# Altium PCB lab1_kuchenov_usb_spi.PcbDoc
Units mm, origin at the board's own origin, x right, y up, seen from the top; angles counter-clockwise.
Board outline 46.3 x 26.3 mm, 4 copper layers (Top Layer, Signal Layer 1, Signal Layer 2, Bottom Layer), stack 1.522 mm thick; 25 components, 25 nets, 88 pads, 166 vias.
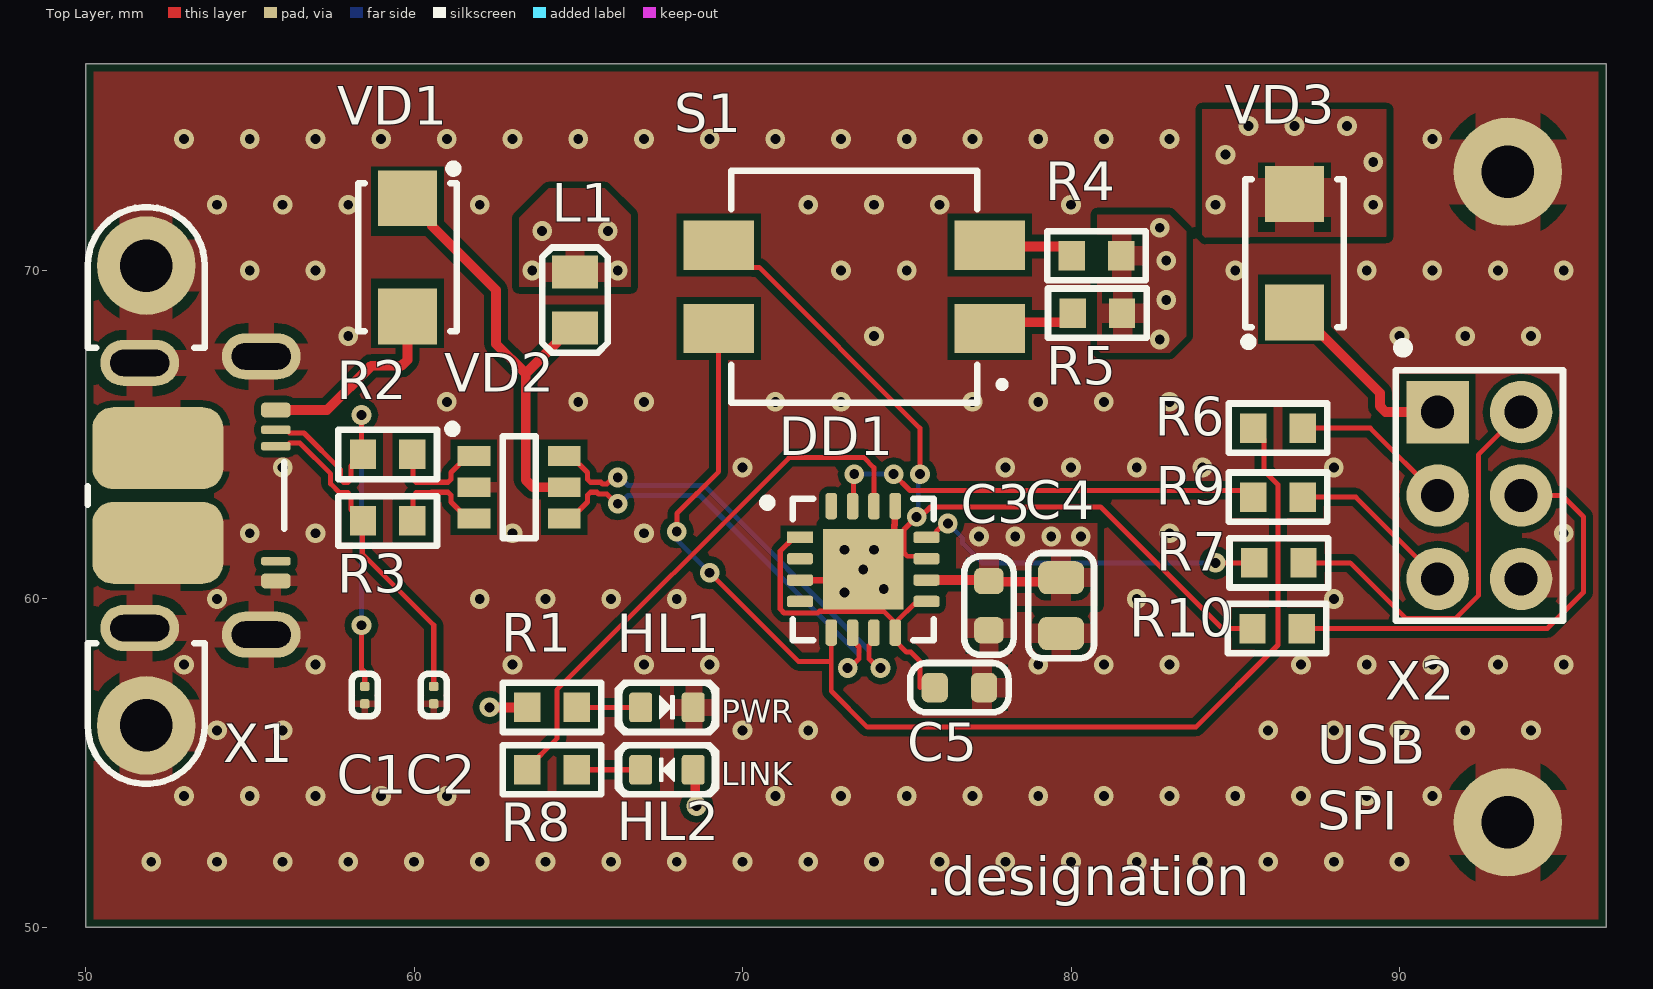
[diagram p0: Top Layer view]
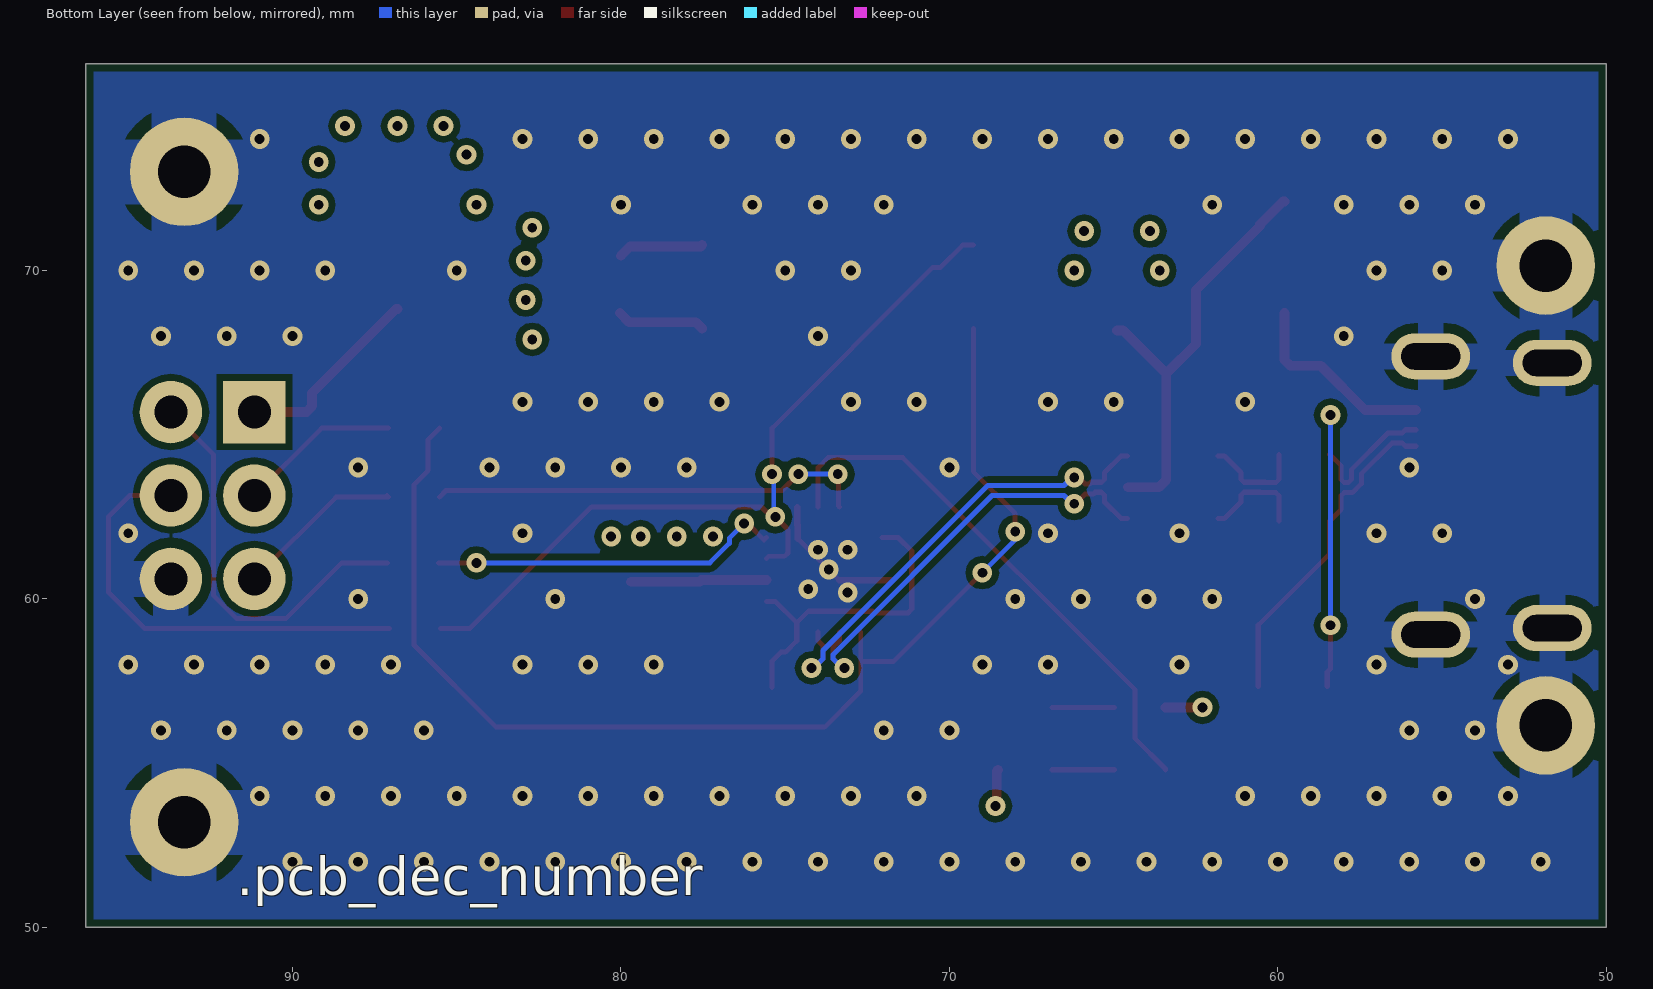
[diagram p1: Bottom Layer view, seen from below]
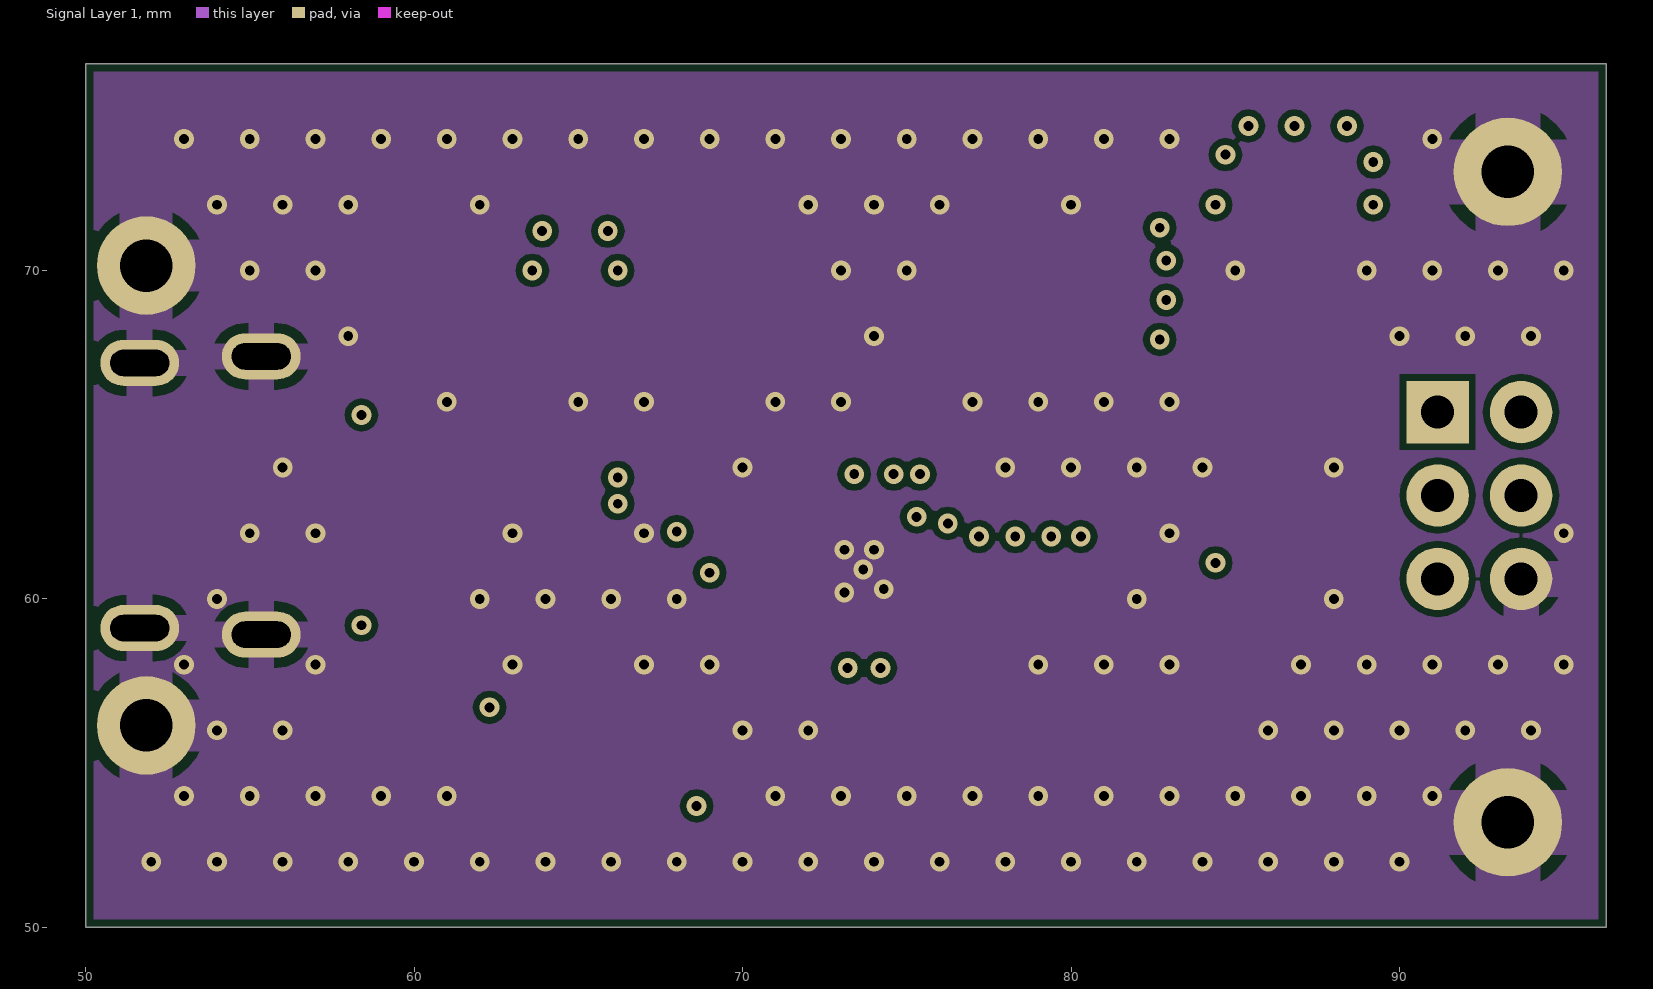
[diagram p2: Signal Layer 1]
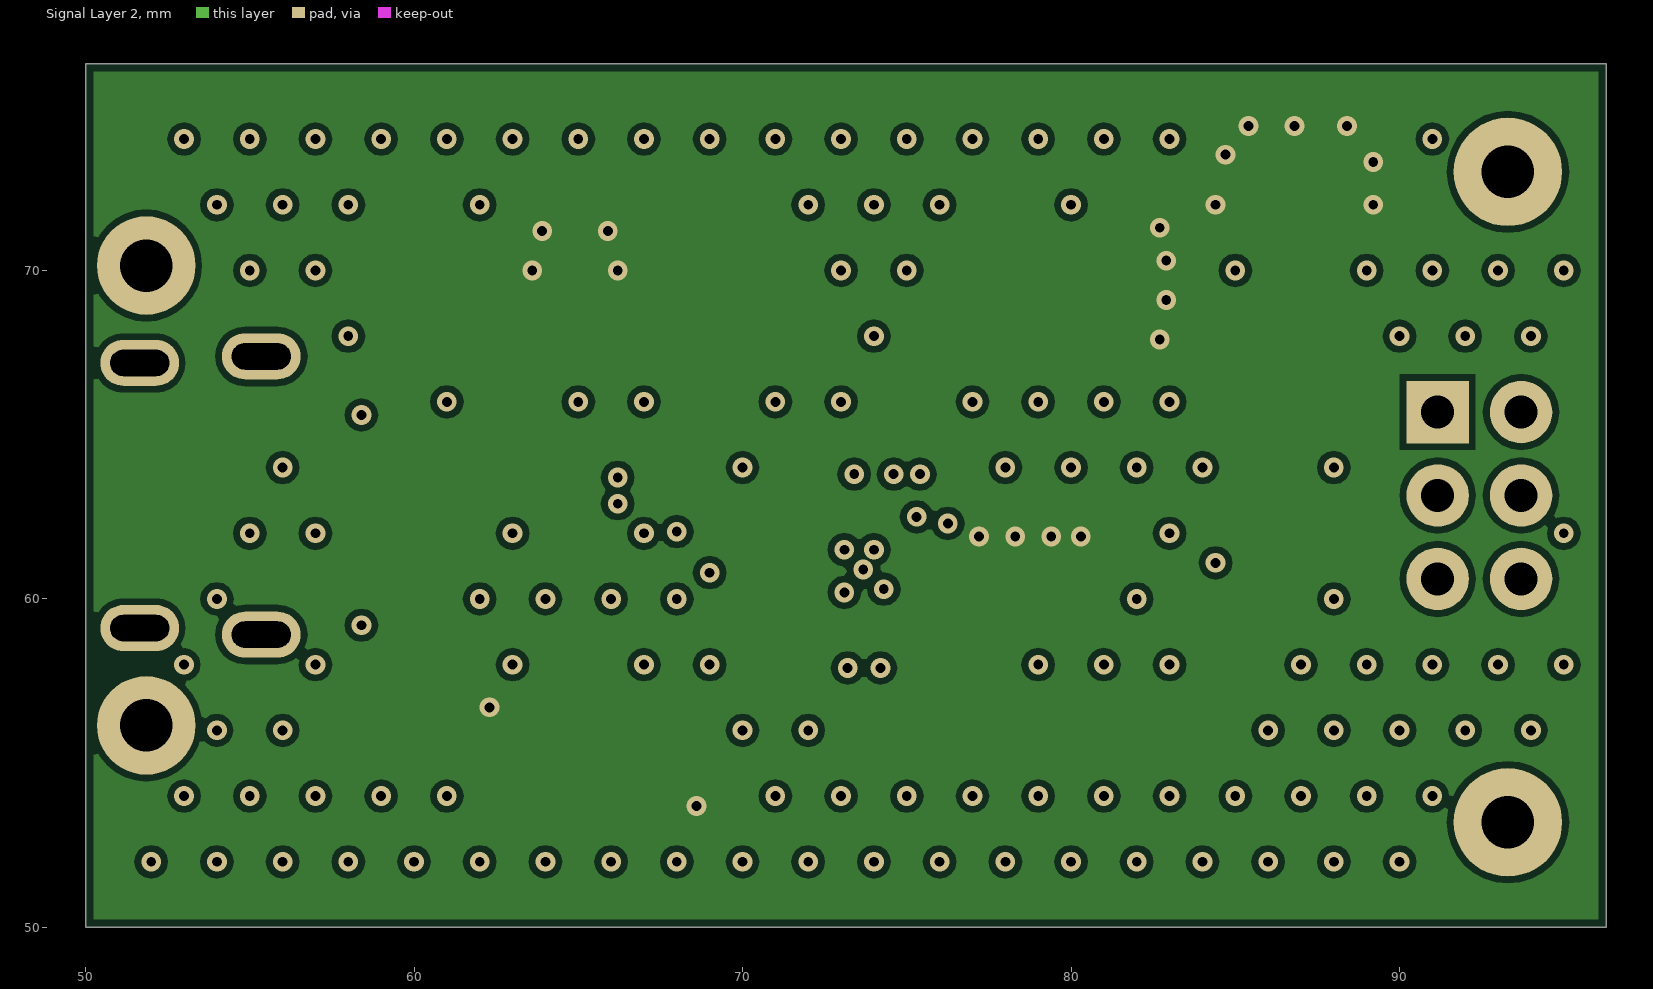
[diagram p3: Signal Layer 2]

## Layer stack, top to bottom
Top Solder: solder mask 0.0102, Solder Resist, Dk 3.5
Top Layer: signal copper 0.018
Prepreg 1: prepreg 0.125, FR4 HiTg170, Dk 5.07
Signal Layer 1: signal copper 0.018
Core 1: core 1.2, FR4, Dk 4.6
Signal Layer 2: signal copper 0.018
Prepreg 2: prepreg 0.125, FR4 HiTg170, Dk 5.07
Bottom Layer: signal copper 0.018
Bottom Solder: solder mask 0.0102, Solder Resist, Dk 3.5

## Board outline
50,50 96.3,50 96.3,76.3 50,76.3

## Design rules (kind name [scope] priority, off if disabled: settings)
AcuteAngle min_acute_angle [OnCopper] p1: minimum=3.50000000000000E+0001 checktracksonly=FALSE // Минимальный угол между примитивами топологии
BoardOutlineClearance board_outline_clearance_std [NOT (OnLayer('Bottom Overlay') OR OnLayer('Top Overlay'))] p1: gap=0.25 ignorepadtopadclearanceinfootprint=FALSE except(0: Arc-SplitContinuation Track-SplitContinuation SMDPad-SplitContinuation THPad-SplitContinuation Via-SplitContinuation Fill-SplitContinuation Poly-SplitContinuation Region-SplitContinuation Text-SplitContinuation) // Отступ элементов топологии от края фрезеруемой печатной платы
Clearance clearance_outer_18um_std [OnTopLayer OR OnBottomLayer] p1: gap=0.125 ignorepadtopadclearanceinfootprint=TRUE except(0.2: Arc-Fill Arc-Poly Track-Fill Track-Poly SMDPad-SMDPad SMDPad-Fill SMDPad-Poly THPad-Fill THPad-Poly Via-Fill Via-Poly Fill-Fill Fill-Poly Poly-Poly Poly-Region Poly-Text; 0.25: Arc-Hole Track-Hole SMDPad-Hole THPad-Hole Via-Hole Fill-Hole Poly-Hole Region-Hole Text-Hole) // Зазоры на внешних слоях
Clearance clearance_inner_18um_std [NOT (OnTopLayer Or OnBottomLayer)] p2: gap=0.125 ignorepadtopadclearanceinfootprint=FALSE except(0.2: Arc-Fill Arc-Poly Track-Fill Track-Poly SMDPad-SMDPad SMDPad-Fill SMDPad-Poly THPad-Fill THPad-Poly Via-Fill Via-Poly Fill-Fill Fill-Poly Poly-Poly Poly-Region Poly-Text; 0.25: Arc-Hole Track-Hole SMDPad-Hole THPad-Hole Via-Hole Fill-Hole Poly-Hole Region-Hole Text-Hole) // Зазоры на внутренних слоях
ComponentClearance [All] p1: gap=0 collisioncheckmode=3 verticalgap=0 showdistances=FALSE
DiffPairsRouting "Schematic Differential Pairs Routing_5" [InNet('D_R_N')] p1: maxlimit=0.254 minlimit=0.15 mostfreqgap=0.254 toplayer_maxgap=0.15 toplayer_prefgap=0.15 toplayer_minwidth=0.155 toplayer_maxwidth=0.155 toplayer_prefwidth=0.155 bottomlayer_maxgap=0.15 bottomlayer_prefgap=0.15 bottomlayer_minwidth=0.155 bottomlayer_maxwidth=0.155 bottomlayer_prefwidth=0.155 impedanceprofiledriven=TRUE impedanceprofileid={1B1F1868-2FFB-4D51-908A-913D90CA9AFC} impedanceprofilevalue=95.000000 maxuncoupledlength=12.7
DiffPairsRouting "Schematic Differential Pairs Routing_4" [InNet('USB_D_N')] p2: maxlimit=0.254 minlimit=0.15 mostfreqgap=0.254 toplayer_maxgap=0.15 toplayer_prefgap=0.15 toplayer_minwidth=0.155 toplayer_maxwidth=0.155 toplayer_prefwidth=0.155 bottomlayer_maxgap=0.15 bottomlayer_prefgap=0.15 bottomlayer_minwidth=0.155 bottomlayer_maxwidth=0.155 bottomlayer_prefwidth=0.155 impedanceprofiledriven=TRUE impedanceprofileid={1B1F1868-2FFB-4D51-908A-913D90CA9AFC} impedanceprofilevalue=95.000000 maxuncoupledlength=12.7
DiffPairsRouting "Schematic Differential Pairs Routing_3" [InNet('USB_D_P')] p3: maxlimit=0.254 minlimit=0.15 mostfreqgap=0.254 toplayer_maxgap=0.15 toplayer_prefgap=0.15 toplayer_minwidth=0.155 toplayer_maxwidth=0.155 toplayer_prefwidth=0.155 bottomlayer_maxgap=0.15 bottomlayer_prefgap=0.15 bottomlayer_minwidth=0.155 bottomlayer_maxwidth=0.155 bottomlayer_prefwidth=0.155 impedanceprofiledriven=TRUE impedanceprofileid={1B1F1868-2FFB-4D51-908A-913D90CA9AFC} impedanceprofilevalue=95.000000 maxuncoupledlength=12.7
DiffPairsRouting "Schematic Differential Pairs Routing_2" [InNet('CN_D_P')] p4: maxlimit=0.254 minlimit=0.15 mostfreqgap=0.254 toplayer_maxgap=0.15 toplayer_prefgap=0.15 toplayer_minwidth=0.155 toplayer_maxwidth=0.155 toplayer_prefwidth=0.155 bottomlayer_maxgap=0.15 bottomlayer_prefgap=0.15 bottomlayer_minwidth=0.155 bottomlayer_maxwidth=0.155 bottomlayer_prefwidth=0.155 impedanceprofiledriven=TRUE impedanceprofileid={1B1F1868-2FFB-4D51-908A-913D90CA9AFC} impedanceprofilevalue=95.000000 maxuncoupledlength=12.7
DiffPairsRouting "Schematic Differential Pairs Routing_1" [InNet('D_R_P')] p5: maxlimit=0.254 minlimit=0.15 mostfreqgap=0.254 toplayer_maxgap=0.15 toplayer_prefgap=0.15 toplayer_minwidth=0.155 toplayer_maxwidth=0.155 toplayer_prefwidth=0.155 bottomlayer_maxgap=0.15 bottomlayer_prefgap=0.15 bottomlayer_minwidth=0.155 bottomlayer_maxwidth=0.155 bottomlayer_prefwidth=0.155 impedanceprofiledriven=TRUE impedanceprofileid={1B1F1868-2FFB-4D51-908A-913D90CA9AFC} impedanceprofilevalue=95.000000 maxuncoupledlength=12.7
DiffPairsRouting "Schematic Differential Pairs Routing" [InNet('CN_D_N')] p6: maxlimit=0.254 minlimit=0.15 mostfreqgap=0.254 toplayer_maxgap=0.15 toplayer_prefgap=0.15 toplayer_minwidth=0.155 toplayer_maxwidth=0.155 toplayer_prefwidth=0.155 bottomlayer_maxgap=0.15 bottomlayer_prefgap=0.15 bottomlayer_minwidth=0.155 bottomlayer_maxwidth=0.155 bottomlayer_prefwidth=0.155 impedanceprofiledriven=TRUE impedanceprofileid={1B1F1868-2FFB-4D51-908A-913D90CA9AFC} impedanceprofilevalue=95.000000 maxuncoupledlength=12.7
DiffPairsRouting diff_pairs_routing [All] p7: maxlimit=0.254 minlimit=0.127 mostfreqgap=0.254 toplayer_maxgap=0.127 toplayer_prefgap=0.127 toplayer_minwidth=0.143 toplayer_maxwidth=0.143 toplayer_prefwidth=0.143 midlayer1_minwidth=0.381 midlayer1_maxwidth=0.381 midlayer1_prefwidth=0.381 midlayer2_minwidth=0.381 midlayer2_maxwidth=0.381 midlayer2_prefwidth=0.381 bottomlayer_maxgap=0.127 bottomlayer_prefgap=0.127 bottomlayer_minwidth=0.143 bottomlayer_maxwidth=0.143 bottomlayer_prefwidth=0.143 impedanceprofiledriven=TRUE impedanceprofileid={FD46899E-B5A2-4EF5-A302-5D2DB6A51F35} maxuncoupledlength=12.7 // Правила трассировки дифференциальных пар
HoleSize min_hole_size_std [IsPad] p1: absolutevalues=TRUE maxlimit=5.9 minlimit=0.6 maxpercent=80.000 minpercent=20.000 // Диаметр межслойного переходного отверстия
HoleSize min_hole_size_via_std [IsVia] p2: absolutevalues=TRUE maxlimit=5.9 minlimit=0.3 maxpercent=80.000 minpercent=20.000 // Минимальный диаметр монтажного отверстия
HoleToHoleClearance hole_to_hole_clearance_std [All] p1: gap=0.2 allowstackedmicrovias=FALSE // Минимальное расстояние между краями двух отверстий
MinimumAnnularRing min_via_ar_std [All] p1: minimumring=0.15 // Поясок площадки переходного отверстия (Annular ring VIA)
MinimumAnnularRing min_pad_ar_std [All] p2: minimumring=0.2 // Поясок монтажной контактной площадки (Annular ring PAD)
MinimumSolderMaskSliver min_solder_mask_bridge_std [All] p1: minsoldermaskwidth=0.15 // Мнимальная ширина масочного мостика
PlaneClearance plane_clearance_18um_std [All] p1: clearance=0.2 // Отступ полигона (для слоя plane) от элементов топологии
PlaneConnect [All] p1: planeconnectstyle=Relief reliefexpansion=0.5 reliefentries=4 reliefconductorwidth=0.2 reliefairgap=0.2
PolygonConnect poly_connect_to_pad<=0.3 [(AsMM(PadXSize_AllLayers)<=0.301) or (AsMM(PadYSize_AllLayers)<=0.301)] p1: thpad.connectstyle=Relief thpad.reliefconductorwidth=0.2 thpad.reliefentries=4 thpad.polygonreliefangle="90 Angle" thpad.airgapwidth=0.2 smdpad.connectstyle=Relief smdpad.reliefconductorwidth=0.2 smdpad.reliefentries=4 smdpad.polygonreliefangle="90 Angle" smdpad.airgapwidth=0.2 via.connectstyle=Direct via.reliefconductorwidth=0.254 via.reliefentries=4 via.polygonreliefangle="90 Angle" via.airgapwidth=0.254 // Правила подключения полигонов для падов от 0,3мм и меньше
PolygonConnect poly_connect_to_pad<=0.4 [(AsMM(PadXSize_AllLayers)<=0.401) or (AsMM(PadYSize_AllLayers)<=0.401)] p2: thpad.connectstyle=Relief thpad.reliefconductorwidth=0.26 thpad.reliefentries=4 thpad.polygonreliefangle="90 Angle" thpad.airgapwidth=0.2 smdpad.connectstyle=Relief smdpad.reliefconductorwidth=0.26 smdpad.reliefentries=4 smdpad.polygonreliefangle="90 Angle" smdpad.airgapwidth=0.2 via.connectstyle=Direct via.reliefconductorwidth=0.254 via.reliefentries=4 via.polygonreliefangle="90 Angle" via.airgapwidth=0.254 // Правила подключения полигонов для падов от 0,4 и меньше
PolygonConnect poly_connect_to_pad<=0.6 [(AsMM(PadXSize_AllLayers)<=0.601) or (AsMM(PadYSize_AllLayers)<=0.601)] p3: thpad.connectstyle=Relief thpad.reliefconductorwidth=0.33 thpad.reliefentries=4 thpad.polygonreliefangle="90 Angle" thpad.airgapwidth=0.2 smdpad.connectstyle=Relief smdpad.reliefconductorwidth=0.33 smdpad.reliefentries=4 smdpad.polygonreliefangle="90 Angle" smdpad.airgapwidth=0.2 via.connectstyle=Direct via.reliefconductorwidth=0.254 via.reliefentries=4 via.polygonreliefangle="90 Angle" via.airgapwidth=0.254 // Правила подключения полигонов для падов от 0,6мм и меньше
PolygonConnect poly_connect_to_pad<=0.7 [(AsMM(PadXSize_AllLayers)<=0.701) or (AsMM(PadYSize_AllLayers)<=0.701)] p4: thpad.connectstyle=Relief thpad.reliefconductorwidth=0.46 thpad.reliefentries=4 thpad.polygonreliefangle="90 Angle" thpad.airgapwidth=0.2 smdpad.connectstyle=Relief smdpad.reliefconductorwidth=0.46 smdpad.reliefentries=4 smdpad.polygonreliefangle="90 Angle" smdpad.airgapwidth=0.2 via.connectstyle=Direct via.reliefconductorwidth=0.254 via.reliefentries=4 via.polygonreliefangle="90 Angle" via.airgapwidth=0.254 // Правила подключения полигонов для падов от 0,7мм и меньше
PolygonConnect poly_connect_to_pad<=0.8 [(AsMM(PadXSize_AllLayers)<=0.8)or(AsMM(PadYSize_AllLayers)<=0.8)] p5: thpad.connectstyle=Relief thpad.reliefconductorwidth=0.53 thpad.reliefentries=4 thpad.polygonreliefangle="90 Angle" thpad.airgapwidth=0.3 smdpad.connectstyle=Relief smdpad.reliefconductorwidth=0.53 smdpad.reliefentries=4 smdpad.polygonreliefangle="90 Angle" smdpad.airgapwidth=0.2 via.connectstyle=Direct via.reliefconductorwidth=0.254 via.reliefentries=4 via.polygonreliefangle="90 Angle" via.airgapwidth=0.254 // Правила подключения полигонов для падов от 0,8мм и меньше
PolygonConnect poly_connect_to_pad<=1 [(AsMM(PadXSize_AllLayers)<=1.01)or(AsMM(PadYSize_AllLayers)<=1.01)] p6: thpad.connectstyle=Relief thpad.reliefconductorwidth=0.6 thpad.reliefentries=4 thpad.polygonreliefangle="90 Angle" thpad.airgapwidth=0.3 smdpad.connectstyle=Relief smdpad.reliefconductorwidth=0.6 smdpad.reliefentries=4 smdpad.polygonreliefangle="90 Angle" smdpad.airgapwidth=0.2 via.connectstyle=Direct via.reliefconductorwidth=0.254 via.reliefentries=4 via.polygonreliefangle="90 Angle" via.airgapwidth=0.254 // Правила подключения полигонов для падов от 1мм и меньше
PolygonConnect poly_connect_to_pad<=1.3 [(AsMM(PadXSize_AllLayers)<=1.31)or(AsMM(PadYSize_AllLayers)<=1.31)] p7: thpad.connectstyle=Relief thpad.reliefconductorwidth=0.66 thpad.reliefentries=4 thpad.polygonreliefangle="90 Angle" thpad.airgapwidth=0.3 smdpad.connectstyle=Relief smdpad.reliefconductorwidth=0.86 smdpad.reliefentries=4 smdpad.polygonreliefangle="90 Angle" smdpad.airgapwidth=0.2 via.connectstyle=Direct via.reliefconductorwidth=0.254 via.reliefentries=4 via.polygonreliefangle="90 Angle" via.airgapwidth=0.254 // Правила подключения полигонов для падов от 1,3мм и меньше
PolygonConnect poly_connect_to_pad<=1.6 [(AsMM(PadXSize_AllLayers)<=1.61)or(AsMM(PadYSize_AllLayers)<=1.61)] p8: thpad.connectstyle=Relief thpad.reliefconductorwidth=0.8 thpad.reliefentries=4 thpad.polygonreliefangle="90 Angle" thpad.airgapwidth=0.3 smdpad.connectstyle=Relief smdpad.reliefconductorwidth=1 smdpad.reliefentries=4 smdpad.polygonreliefangle="90 Angle" smdpad.airgapwidth=0.2 via.connectstyle=Direct via.reliefconductorwidth=0.254 via.reliefentries=4 via.polygonreliefangle="90 Angle" via.airgapwidth=0.254 // Правила подключения полигонов для падов от 1,6мм и меньше
PolygonConnect poly_connect_to_pad<=1.8 [(AsMM(PadXSize_AllLayers)<=1.8)or(AsMM(PadYSize_AllLayers)<=1.8)] p9: thpad.connectstyle=Relief thpad.reliefconductorwidth=1 thpad.reliefentries=4 thpad.polygonreliefangle="90 Angle" thpad.airgapwidth=0.3 smdpad.connectstyle=Relief smdpad.reliefconductorwidth=1.2 smdpad.reliefentries=4 smdpad.polygonreliefangle="90 Angle" smdpad.airgapwidth=0.2 via.connectstyle=Direct via.reliefconductorwidth=0.254 via.reliefentries=4 via.polygonreliefangle="90 Angle" via.airgapwidth=0.254 // Правила подключения полигонов для падов от 1,8мм и меньше
PolygonConnect poly_connect_to_pad<=2 [(AsMM(PadXSize_AllLayers)<=2.01)or(AsMM(PadYSize_AllLayers)<=2.01)] p10: thpad.connectstyle=Relief thpad.reliefconductorwidth=1.1 thpad.reliefentries=4 thpad.polygonreliefangle="90 Angle" thpad.airgapwidth=0.3 smdpad.connectstyle=Relief smdpad.reliefconductorwidth=1.4 smdpad.reliefentries=4 smdpad.polygonreliefangle="90 Angle" smdpad.airgapwidth=0.2 via.connectstyle=Direct via.reliefconductorwidth=0.254 via.reliefentries=4 via.polygonreliefangle="90 Angle" via.airgapwidth=0.254 // Правила подключения полигонов для падов от 2мм и меньше
PolygonConnect poly_connect_to_pad<=2.3 [(AsMM(PadXSize_AllLayers)<=2.31)or(AsMM(PadYSize_AllLayers)<=2.31)] p11: thpad.connectstyle=Relief thpad.reliefconductorwidth=1.2 thpad.reliefentries=4 thpad.polygonreliefangle="90 Angle" thpad.airgapwidth=0.3 smdpad.connectstyle=Relief smdpad.reliefconductorwidth=1.4 smdpad.reliefentries=4 smdpad.polygonreliefangle="90 Angle" smdpad.airgapwidth=0.2 via.connectstyle=Direct via.reliefconductorwidth=0.254 via.reliefentries=4 via.polygonreliefangle="90 Angle" via.airgapwidth=0.254 // Правила подключения полигонов для падов от 2,3мм и меньше
PolygonConnect poly_connect_to_pad<=2.5 [(AsMM(PadXSize_AllLayers)<=2.51)or(AsMM(PadYSize_AllLayers)<=2.51)] p12: thpad.connectstyle=Relief thpad.reliefconductorwidth=1.2 thpad.reliefentries=4 thpad.polygonreliefangle="90 Angle" thpad.airgapwidth=0.3 smdpad.connectstyle=Relief smdpad.reliefconductorwidth=1.4 smdpad.reliefentries=4 smdpad.polygonreliefangle="90 Angle" smdpad.airgapwidth=0.2 via.connectstyle=Direct via.reliefconductorwidth=0.254 via.reliefentries=4 via.polygonreliefangle="90 Angle" via.airgapwidth=0.254 // Правила подключения полигонов для падов от 2,5мм и меньше
PolygonConnect poly_connect_to_pad<=2.7 [(AsMM(PadXSize_AllLayers)<=2.71)or(AsMM(PadYSize_AllLayers)<=2.71)] p13: thpad.connectstyle=Relief thpad.reliefconductorwidth=1.4 thpad.reliefentries=4 thpad.polygonreliefangle="90 Angle" thpad.airgapwidth=0.3 smdpad.connectstyle=Relief smdpad.reliefconductorwidth=1.6 smdpad.reliefentries=4 smdpad.polygonreliefangle="90 Angle" smdpad.airgapwidth=0.2 via.connectstyle=Direct via.reliefconductorwidth=0.254 via.reliefentries=4 via.polygonreliefangle="90 Angle" via.airgapwidth=0.254 // Правила подключения полигонов для падов от 2,7мм и меньше
PolygonConnect poly_connect_to_pad<=3 [(AsMM(PadXSize_AllLayers)<=3.01)or(AsMM(PadYSize_AllLayers)<=3.01)] p14: thpad.connectstyle=Relief thpad.reliefconductorwidth=1.6 thpad.reliefentries=4 thpad.polygonreliefangle="90 Angle" thpad.airgapwidth=0.3 smdpad.connectstyle=Relief smdpad.reliefconductorwidth=1.8 smdpad.reliefentries=4 smdpad.polygonreliefangle="90 Angle" smdpad.airgapwidth=0.2 via.connectstyle=Direct via.reliefconductorwidth=0.254 via.reliefentries=4 via.polygonreliefangle="90 Angle" via.airgapwidth=0.254 // Правила подключения полигонов для падов от 3мм и меньше
PolygonConnect poly_connect_to_pad<=7 [(AsMM(PadXSize_AllLayers)<7.01)or(AsMM(PadYSize_AllLayers)<=7.01)] p15: thpad.connectstyle=Relief thpad.reliefconductorwidth=2 thpad.reliefentries=4 thpad.polygonreliefangle="90 Angle" thpad.airgapwidth=0.4 smdpad.connectstyle=Relief smdpad.reliefconductorwidth=2 smdpad.reliefentries=4 smdpad.polygonreliefangle="90 Angle" smdpad.airgapwidth=0.3 via.connectstyle=Direct via.reliefconductorwidth=0.254 via.reliefentries=4 via.polygonreliefangle="90 Angle" via.airgapwidth=0.254 // Правила подключения полигонов для падов от 7мм и меньше
PolygonConnect poly_connect_to_pad [All] p16: thpad.connectstyle=Relief thpad.reliefconductorwidth=0.25 thpad.reliefentries=4 thpad.polygonreliefangle="90 Angle" thpad.airgapwidth=0.2 smdpad.connectstyle=Relief smdpad.reliefconductorwidth=0.25 smdpad.reliefentries=4 smdpad.polygonreliefangle="90 Angle" smdpad.airgapwidth=0.2 via.connectstyle=Direct via.reliefconductorwidth=0.25 via.reliefentries=4 via.polygonreliefangle="90 Angle" via.airgapwidth=0.2 // Правила подключения полигонов общие
RoutingCorners [All] p1 off: cornerstyle=45-Degree minsetback=2.5 maxsetback=2.5
RoutingVias [All] p1: holewidth=0.3 width=0.6 viastyle="Through Hole" minholewidth=0.3 minwidth=0.6 maxholewidth=5.9 maxwidth=6.4
SilkToSilkClearance silk_to_silk_clearance_std [All] p1 off: silktosilkclearance=0.15 // Отступ текста шелкографии от других примитивов шелкографии
SilkToSolderMaskClearance silk_to_solder_mask_clearance_std [IsPad] p1 off: minsilkscreentomaskgap=0.15 clearancetoexposedcopper=FALSE // Минимальное расстояние между элементами шелкографии и вскрытой медью
SolderMaskExpansion solder_mask_expansion_std [All] p1: expansion=0.05 // Припуск паяльной масски
UnRoutedNet [All] p1: checkbadconnections=TRUE
Width width_18um_std [All] p1: maxlimit=10 minlimit=0.125 preferedwidth=0.15 checkconnectedcopper=TRUE // Ширина проводников (общая)
19 further rules are at their usual default settings.

## Classes and differential pairs
differential pair class USB_SIGNALS: CN_D D_R USB_D
differential pair USB_D: +USB_D_P -USB_D_N
differential pair D_R: +D_R_P -D_R_N
differential pair CN_D: +CN_D_P -CN_D_N

## Components (designator, comment, footprint, x,y, rotation, side; value= is the part's Value field where it differs from the comment)
C1 "47" C0201 58.5,57.075 r270 top
C2 "47" C0201 60.6,57.075 r270 top
C3 "0,1 мк" C0603 77.5,59.8 r270 top
C4 "4,7 мк" C0805 79.7,59.8 r90 top
C5 "0,1 мк" C0603 76.6,57.3 r0 top
DD1 "FT220XQ" QFN-16-400X400X90 73.675,60.9 r0 top
HL1 "TLMS1000-GS08" HL0603 67.7,56.7 r180 top
HL2 "TLMB1100-GS08" HL0603 67.7,54.8 r0 top
L1 "MI0805K400R-10" MI-2-0805 64.9,69.1 r90 top
R1 "220" R0603 64.2,56.7 r180 top
R2 "27" R0603 59.2,64.4 r0 top
R3 "27" R0603 59.2,62.375 r0 top
R4 "10 к" R0603 80.775,70.45 r0 top
R5 "10 к" R0603 80.8,68.7 r0 top
R6 "33" R0603 86.3,65.2 r0 top
R7 "33" R0603 86.325,61.1 r0 top
R8 "220" R0603 64.2,54.8 r0 top
R9 "33" R0603 86.3,63.1 r0 top
R10 "33" R0603 86.275,59.1 r0 top
S1 "SDA02H1SBD" SDA02H1SBD 73.4,69.5 r180 top
VD1 "SL13-E3/5AT" DO-214AC 59.8,70.4 r270 top
VD2 "USBLC6-2SC6" SOT23-6L 63.2,63.4 r0 top
VD3 "SL13-E3/5AT" DO-214AC 86.8,70.525 r90 top
X1 "2108877-1" 2108877-1 52.1,63.15 r90 top
X2 "DS1021-2x3SF11-B" DS1021-2X3SF11-B 92.43,63.15 r270 top

## Footprints (in the part's own frame and the unit in brackets; to place one, negate y for a bottom-side part, rotate by r counter-clockwise, add the part's x,y. Pads: shape width x height; smd on the part's side, far side on the other; paste and mask are expansions set on the pad)
2108877-1 [mm]
  rrect50% 0.45x0.9 smd: 1(2.6,-3.696) 5(-2.6,-3.696)
  rrect50% 0.25x0.9 smd: 2(2,-3.696) 3(1.5,-3.696) 4(-2,-3.696)
  round 3 hole 1.6: TP1(-7,0.25) TP1(7,0.25)
  oval 1.4x2.4 hole 0.8 slot 1.8 at 90 deg mask+0.102: TP1(-4.235,-3.25) TP1(-4.035,0.45) TP1(4.035,0.45) TP1(4.235,-3.25)
  rrect50% 2.5x3.98 smd: TP1(-1.441,-0.104) TP1(1.441,-0.104)
  silkscreen extent -8.78,-3.95 8.78,2.03, body extent -8.9,-3.95 8.9,3.95, height 3.39
C0201 [mm] "Chip Capacitor, 2-Leads, Body 0,60x0,30mm, IPC Medium Density"
  rrect50% 0.28x0.3 smd: 1(-0.265,0) 2(0.265,0)
  silkscreen extent -0.65,-0.4 0.65,0.4, body extent -0.3,-0.15 0.3,0.15, height 0.29
C0603 [mm] "Chip Capacitor, 2-Leads, Body 1,60x0,80mm, IPC Medium Density"
  rrect50% 0.8x0.9 smd: 1(-0.75,0) 2(0.75,0)
  silkscreen extent -1.5,-0.75 1.5,0.75, body extent -0.8,-0.4 0.8,0.4, height 0.8
C0805 [mm] "Chip Capasitor, 2-Leads, Body 2,00x1,25mm, IPC Medium Density"
  rrect50% 1x1.4 smd: 1(-0.85,0) 2(0.85,0)
  silkscreen extent -1.6,-1 1.6,1, body extent -1,-0.62 1,0.63, height 0.6
DO-214AC [mm] "Molded Diode, 2-Leads, Body 4,25x2,67mm, IPC Medium Density"
  rect 1.7x1.8 smd: 1(-1.8,0) 2(1.8,0)
  silkscreen extent -2.82,-1.5 2.25,1.53, body extent -2.55,-1.3 2.55,1.3, height 2.26
DS1021-2X3SF11-B [mm]
  rect 1.9x1.9 hole 1: 1(-2.54,-1.27)
  round 1.9 hole 1: 2(0,-1.27) 4(-2.54,1.27)
  round 1.9 hole 1 mask+0.102: 3(2.54,-1.27) 5(0,1.27) 6(2.54,1.27)
  silkscreen extent -4.5,-2.55 3.81,2.54, body extent -3.81,-2.54 3.81,2.54, height 8.59
HL0603 [mm] "Chip Resistor, 2-Leads, Body 1,60x0,80mm, IPC Medium Density"
  rrect25% 0.7x0.9 smd: 1(-0.8,0) 2(0.8,0)
  silkscreen extent -1.5,-0.75 1.5,0.75, body extent -0.81,-0.4 0.81,0.4, height 0.64
MI-2-0805 [mm] "Chip Inductor, 2-Leads, Body 2,00x1,25mm, IPC Medium Density"
  rect 1x1.4 smd: 1(-0.85,0) 2(0.85,0)
  silkscreen extent -1.6,-1 1.6,1, body extent -1,-0.62 1,0.63, height 0.9
QFN-16-400X400X90 [mm] "QFN, 16-Leads, Body 4,00x4,00mm, Pitch 0,65mm, Thermal Pad 2,65x2,65mm, IPC Medium Density"
  rect 2.45x2.45 smd: 0(0,0)
  rect 0.8x0.35 smd: 1(-1.925,0.975)
  rrect50% 0.8x0.35 smd: 2(-1.925,0.325) 3(-1.925,-0.325) 4(-1.925,-0.975) 9(1.925,-0.975) 10(1.925,-0.325) 11(1.925,0.325) 12(1.925,0.975)
  rrect50% 0.35x0.8 smd: 5(-0.975,-1.925) 6(-0.325,-1.925) 7(0.325,-1.925) 8(0.975,-1.925) 13(0.975,1.925) 14(0.325,1.925) 15(-0.325,1.925) 16(-0.975,1.925)
  silkscreen extent -3.05,-2.15 2.15,2.16, body extent -2.08,-2.08 2.09,2.09, height 0.85
R0603 [mm] "Chip Resistor, 2-Leads, Body 1,60x0,80mm, IPC Medium Density"
  rect 0.8x0.9 smd: 1(-0.75,0) 2(0.75,0)
  silkscreen extent -1.5,-0.75 1.5,0.75, body extent -0.77,-0.43 0.78,0.43, height 0.43
SDA02H1SBD [mm]
  rect 2.15x1.5 smd: 1(-4.125,-1.27) 2(4.125,-1.27) 3(-4.125,1.27) 4(4.125,1.27)
  silkscreen extent -4.6,-3.53 3.74,3.53, body extent -4.65,-3.53 4.65,3.53, height 5.44
SOT23-6L [mm] "SOT23, 6-Leads, Body 2,93x2,80mm, Pitch 0,95mm, IPC Medium Density"
  rect 1x0.6 smd: 1(-1.375,0.95) 2(-1.375,0) 3(-1.375,-0.95) 4(1.375,-0.95) 5(1.375,0) 6(1.375,0.95)
  silkscreen extent -2.16,-1.55 0.5,1.9, body extent -1.41,-1.45 1.41,1.45, height 1.45

## Part data
C1 C2: library part c0003, "=Описание", HelpURL=http://product.samsungsem.com/mlcc/CL03C470JA3NNN.do, ID=c0003, Корпус=0201, Наименование=CL03C470JA3NNNC, Напряжение="25 В", Номинал=47, Номинальное напряжение="25 В", Описание="Конденсатор чип 0201 47 пФ 25 В ±5 %", Отклонение="±5 %", Производитель="Samsung Electro-Mechanics", Рабочие температуры="от –55 °С до +125 °С", Температурный коэффициент емкости=C0G, Фамилия=Козлов
C3 C5: library part c0060, "=Описание", HelpURL=https://www.yageo.com/upload/media/product/productsearch/datasheet/mlcc/UPY-GPHC_X7R_6.3V-to-50V_20.pdf, ID=c0060, Корпус=0603, Наименование=CC0603JRX7R9BB104, Напряжение="50 В", Номинал="0,1 мк", Номинальное напряжение="50 В", Описание="Конденсатор чип 0603 100 нФ 50 В ±5 %", Отклонение="±5 %", Производитель="YAGEO Corp.", Рабочие температуры="от –55 °С до +125 °С", Температурный коэффициент емкости=X7R, Фамилия=Ларионов
C4: library part c0113, "=Описание", HelpURL=https://www.yageo.com/upload/media/product/productsearch/datasheet/mlcc/UPY-GPHC_X5R_4V-to-50V_26.pdf, ID=c0113, Корпус=0603, Наименование=CC0805KKX5R9BB475, Напряжение="50 В", Номинал="4,7 мк", Номинальное напряжение="50 В", Описание="Конденсатор чип 0805 4,7 мкФ 50 В ±10 %", Отклонение="±10 %", Производитель="YAGEO Corp.", Рабочие температуры="от –55 °С до +85 °С", Температурный коэффициент емкости=X5R, Фамилия=Паньков
DD1: library part dd0022, "=Описание", HelpURL=https://ftdichip.com/products/ft220xq/, ID=dd0022, Корпус=QFN-16, Наименование=FT220XQ, Описание="Преобразователь USB-SPI", Производитель="FTDI Limited", Фамилия=Кученов
HL1: library part hl0001, "=Описание", Colour=Красный, HelpURL=https://www.vishay.com/leds/list/product-83172/, ID=hl0001, Корпус=0603, Наименование=TLMS1000-GS08, Номинальная длина волны="628 нм", Номинальная сила света="4 мкд", Номинальное падение напряжения="1,8 В", Номинальный прямой ток="15 мА", Описание="Светодиод чип 0603 красный", Производитель="Vishay Intertechnology, Inc.", Рабочие температуры="от –40 °С до +100 °С", Рассеиваемая мощность="40 мВт", Фамилия=Ларионов, Цвет=Красный
HL2: library part hl0006, "=Описание", Colour=Синий, HelpURL=https://www.vishay.com/leds/list/product-83173/, ID=hl0006, Корпус=0603, Наименование=TLMB1100-GS08, Номинальная длина волны="466 нм", Номинальная сила света="5 мкд", Номинальное падение напряжения="3,9 В", Номинальный прямой ток="30 мА", Описание="Светодиод чип 0603 синий", Примечание="Not for new design", Производитель="Vishay Intertechnology, Inc.", Рабочие температуры="от –40 °С до +100 °С", Рассеиваемая мощность="90 мВт", Фамилия=Ларионов, Цвет=Синий
L1: library part l0003, "=Описание", HelpURL=https://www.laird.com/products/inductive-components-emc-components-and-ferrite-cores/ferrite-chip-beads/0805-series/mi0805k400r-10, ID=l0003, Корпус=0805, Наименование=MI0805K400R-10, Описание="Ферритовая бусина 40 Ом ±25 %", Отклонение, 100 МГц="±25 %", Производитель="Laird Technologies, Inc.", Рабочие температуры="от –40 °С до +125 °С", Сопротивление, 100 МГц="40 Ом", Сопротивление при постоянном токе="0,05 Ом", Фамилия=Кученов
R1 R8: library part r0009, "=Описание", HelpURL=https://www.yageo.com/upload/media/product/productsearch/datasheet/rchip/PYu-RC_Group_51_RoHS_L_11.pdf, ID=r0009, Корпус=0603, Наименование=RC0603FR-07220RL, Номинал=220, Номинальное напряжение="75 В", Номинальный ток="1 А", Описание="Резистор чип 0603 220 Ом ±1 % 0,1 Вт", Отклонение="±1 %", Производитель="YAGEO Corp.", Рабочие температуры="от -55 °С до +155 °С", Фамилия=Ларионов
R2 R3: library part r0001, "=Описание", HelpURL=https://www.yageo.com/upload/media/product/productsearch/datasheet/rchip/PYu-RC_Group_51_RoHS_L_11.pdf, ID=r0023, Корпус=0603, Наименование=RC0603FR-0727RL, Номинал=27, Номинальное напряжение="75 В", Номинальный ток="1 А", Описание="Резистор чип 0603 27 Ом ±1 % 0,1 Вт", Отклонение="±1 %", Производитель="YAGEO Corp.", Рабочие температуры="от -55 °С до +155 °С", Фамилия=Кученов
R4 R5: library part r0013, "=Описание", HelpURL=https://www.yageo.com/upload/media/product/productsearch/datasheet/rchip/PYu-RC_Group_51_RoHS_L_11.pdf, ID=r0013, Корпус=0603, Наименование=RC0603FR-0710KL, Номинал="10 к", Номинальное напряжение="75 В", Номинальный ток="1 А", Описание="Резистор чип 0603 10 кОм ±1 % 0,1 Вт", Отклонение="±1 %", Производитель="YAGEO Corp.", Рабочие температуры="от -55 °С до +155 °С", Фамилия=Самарин
R6 R7 R9 R10: library part r0005, "=Описание", HelpURL=https://www.yageo.com/upload/media/product/productsearch/datasheet/rchip/PYu-AA_51_RoHS_L_3.pdf, ID=r0005, Корпус=0603, Наименование=AA0603FR-0733RL, Номинал=33, Номинальное напряжение="75 В", Номинальный ток="1 А", Описание="Резистор чип 0603 33 Ом ±1 % 0,1 Вт", Отклонение="±1 %", Производитель="YAGEO Corp.", Рабочие температуры="от -55 °С до +155 °С", Фамилия=Козлов
S1: library part s0006, "=Описание", HelpURL=https://www.ckswitches.com/products/switches/product-details/DIP/SDA/SDA02H1SBD/, ID=s0006, Количество контактов=4, Корпус="7,06 х 9,30 х 5,45", Наименование=SDA02H1SBD, Описание="2-х позиционный движковый переключатель", Производитель=C&K, Промывка=Запрещена, Рабочие температуры="от –40 °С до +85 °С", Сопротивление контакта="50 мОм", Ток нагрузки="100 мА @ 5 В", Фамилия=Козлов
VD1 VD3: library part vd0003, "=Описание", HelpURL=https://www.vishay.com/product?docid=88740, ID=vd0003, Корпус=DO-214AC, Максимальное обратное напряжение="30 В", Максимальное прямое напряжение="0,445 В", Максимальный прямой ток="1,5 А", Наименование=SL13-E3/5AT, Описание="Диод Шоттки 30 В 1,5 А", Производитель="Vishay Intertechnology, Inc.", Рабочие температуры="от –55 °С до +125 °С", Фамилия=Ларионов
VD2: library part vd0004, "=Описание", HelpURL=https://www.st.com/content/st_com/en/products/protection-devices/esd-protection/usb-port-protection/usblc6-2.html, ID=vd0004, Корпус=SOT23-6L, Наименование=USBLC6-2SC6, Описание="Диодная сборка для подавления помех, от 6 В", Производитель=STMicroelectronics, Фамилия=Ларионов
X1: library part x0001, Contact_1=VBUS, Contact_2=D-, Contact_3=D+, Contact_4=ID, Contact_5=GND, HelpURL=https://www.te.com/global-en/product-2108877-1.html, ID=x0001, Наименование=2108877-1, Описание="USB 2.0 Micro USB Type B IP68 гнездо прямой угол", Производитель="TE Connectivity", Фамилия=Ларионов
X2: library part x0015, "=Описание", Contact_1=+5V, Contact_2=MISO, Contact_3=MOSI, Contact_4=CLK, Contact_5=nCS, Contact_6=GND, HelpURL=http://en.connfly.group/product/xVkr=EusQssAN0gN=Aos=mU+UrVkR9kqEAN0gN9g+WqANB+A, ID=x0015, Наименование=DS1021-2x3SF11-B, Описание="PLS 2x3 pin 2,54 мм вилка прямой", Производитель="Connfly Electronic Co., Ltd.", Фамилия=Самарин

## Free pads (board coordinates)
  round 3.3 hole 1.6: 1(93.3,53.2) 1(93.3,73)

## Via types
v1: diameter 0.6, hole 0.3, Top Layer to Bottom Layer, tented both sides, 161 vias
v2: diameter 0.6, hole 0.3, Top Layer to Bottom Layer, 5 vias

## Nets (pads, with @x,y where several pads share a name; then routed paths per layer and width w, separated by ;. In a path a pad name is that pad's centre, name@x,y a point inside that pad or via, vN(x,y) a via of type N, cw(c..) or ccw(c..) an arc to the next point about the centre after c; other vN are vias at no path point)
+5V: C3.1 C4.2 DD1.10 HL2.2 L1.2 R1.2 R4.2 R5.2 VD3.2 | length 6.4
  Top Layer w0.155: C3.1@77.55,60.575 C3.1@77.6,60.525
  Top Layer w0.3: v1(62.3,56.7) R1.2@63.425,56.7 ; HL2.2@68.525,54.8 68.563,54.762 68.563,53.737 v1(68.6,53.7) ; DD1.10@75.575,60.575 C3.1@77.55,60.575 ; C3.1@77.6,60.525 C4.2@79.7,60.525
  other v1: 77.2,61.9 78.3,61.9 79.4,61.9 80.3,61.9 82.7,67.9 82.9,69.1 63.6,70 66.2,70 82.9,70.3 63.9,71.2 65.9,71.2 82.7,71.3 84.4,72 89.2,72 89.2,73.3 84.7,73.525 85.4,74.4 86.8,74.4 88.4,74.4
CLK: DD1.12 R7.1 | length 10.8
  Top Layer w0.15: DD1.12@75.575,61.875 75.65,61.8 76.15,62.3 v1(76.25,62.3) ; v1(84.4,61.1) R7.1@85.55,61.1
  Bottom Layer w0.15: v1(76.25,62.3) 76.7,61.85 76.7,61.693 77.293,61.1 v1(84.4,61.1)
CN_5V_IN: VD1.2 X1.1 | length 6.1
  Top Layer w0.3: X1.1 57.35,65.75 58.7,67.1 59.624,67.1 59.8,67.276 VD1.2@59.8,68.7
CN_CLK: R7.2 X2.4 | length 12.4
  Top Layer w0.15: R7.2@87.1,61.1 88.5,61.1 90.2,59.4 91.7,59.4 92.4,60.1 92.4,64.39 X2.4
CN_D_N: C1.1 R2.1 X1.2 | length 13.6
  Top Layer w0.155: X1.2 56.121,65.15 56.218,65.053 56.65,65.053 57.767,63.935 57.767,63.631 57.858,63.54 57.987,63.54 58.078,63.631 58.078,64.053 58.425,64.4 58.4,64.425 v1(58.4,65.6) ; v1(58.4,59.2) 58.4,57.875 58.5,57.775 C1.1
  Bottom Layer w0.155: v1(58.4,59.2) v1(58.4,65.6)
CN_D_P: C2.1 R3.1 X1.3 | length 10
  Top Layer w0.155: X1.3 56.121,64.65 56.218,64.747 56.523,64.747 57.462,63.809 57.462,63.505 57.732,63.235 57.987,63.235 58.078,63.144 58.078,62.722 58.425,62.375 58.425,61.375 60.6,59.2 C2.1
CN_MISO: R6.2 X2.2 | length 4.9
  Top Layer w0.15: R6.2@87.075,65.2 89.11,65.2 X2.2
CN_MOSI: R9.2 X2.3 | length 5.2
  Top Layer w0.15: R9.2@87.125,63.15 87.075,63.1 88.67,63.1 X2.3
CN_nCS: R10.2 X2.5 | length 13.5
  Top Layer w0.15: R10.2@87.05,59.1 94.5,59.1 95.6,60.2 95.6,62.5 94.95,63.15 X2.5
D_R_N: R2.2 VD2.1 | length 3.1
  Top Layer w0.155: R2.2@59.975,64.4 59.975,63.631 60.066,63.54 60.39,63.54 60.402,63.553 61.032,63.553 61.122,63.643 61.122,63.847 61.625,64.35 VD2.1
D_R_P: R3.2 VD2.3 | length 3.1
  Top Layer w0.155: R3.2@59.975,62.375 59.975,63.144 60.066,63.235 60.516,63.235 60.529,63.247 61.032,63.247 61.122,63.157 61.122,62.953 61.625,62.45 VD2.3
GND: C1.2 C2.2 C3.2 C4.1 C5.2 DD1.0 DD1.3 DD1.13 HL1.1 pad.1 VD2.2 X1.5 X1.TP1 X2.6 | length 4.3
  Top Layer w0.15: DD1.0@73.35,60.575 v2(73.675,60.9) 74.138,61.362 DD1.0@74.615,61.84 ; DD1.13@74.64,62.79 DD1.13@74.65,62.8
  Top Layer w0.2: DD1.3@71.775,60.575 DD1.0@73.35,60.575 ; DD1.0@74.615,61.84 74.615,62.239 74.64,62.264 DD1.13@74.64,62.79
  other v1: 52,52 54,52 56,52 58,52 60,52 62,52 64,52 66,52 68,52 70,52 72,52 74,52 76,52 78,52 80,52 82,52 84,52 86,52 88,52 90,52 53,54 55,54 57,54 59,54 61,54 71,54 73,54 75,54 77,54 79,54 81,54 83,54 85,54 87,54 89,54 91,54 54,56 56,56 70,56 72,56 86,56 88,56 90,56 92,56 94,56 53,58 57,58 63,58 67,58 69,58 79,58 81,58 83,58 87,58 89,58 91,58 93,58 95,58 54,60 62,60 64,60 66,60 68,60 82,60 88,60 55,62 57,62 63,62 67,62 83,62 95,62 56,64 70,64 78,64 80,64 82,64 84,64 88,64 61,66 65,66 67,66 71,66 73,66 77,66 79,66 81,66 83,66 58,68 74,68 90,68 92,68 94,68 55,70 57,70 73,70 75,70 85,70 89,70 91,70 93,70 95,70 54,72 56,72 58,72 62,72 72,72 74,72 76,72 80,72 53,74 55,74 57,74 59,74 61,74 63,74 65,74 67,74 69,74 71,74 73,74 75,74 77,74 79,74 81,74 83,74 91,74
  other v2: 73.1,60.2 74.3,60.3 73.1,61.5 74,61.5
MISO: DD1.5 R6.1 S1.4 | length 37
  Top Layer w0.15: v1(68,62.05) 68,62.6 69.275,63.875 S1.4 ; v1(69,60.8) 71.7,58.1 72.7,58.1 ; DD1.5@72.7,59 72.7,58.1 ; R6.1@85.525,65.2 85.875,64.85 85.875,63.908 86.3,63.482 86.3,58.6 83.8,56.1 73.8,56.1 72.7,57.2 72.7,58.1
  Bottom Layer w0.15: v1(68,62.05) 68,61.8 v1(69,60.8)
MOSI: DD1.15 R9.1 | length 13.4
  Top Layer w0.15: DD1.15@73.35,62.8 73.375,62.825 73.375,63.775 v1(73.4,63.8) ; v1(74.6,63.8) 75.1,63.3 85.325,63.3 R9.1@85.525,63.1
  Bottom Layer w0.15: v1(73.4,63.8) v1(74.6,63.8)
nCS: DD1.11 R10.1 S1.2 | length 25
  Top Layer w0.15: S1.2 69.6,70.77 70.275,70.095 70.505,70.095 75.4,65.2 v1(75.4,63.8) ; DD1.11@75.575,61.225 75.5,61.3 75.015,61.3 74.915,61.4 74.915,62.115 v1(75.3,62.5) 75.422,62.5 75.722,62.8 80.9,62.8 84.6,59.1 R10.1@85.5,59.1
  Bottom Layer w0.15: v1(75.3,62.5) 75.35,62.55 75.35,63.75 v1(75.4,63.8)
NetC5_1: C5.1 DD1.1 DD1.8 DD1.9 | length 10.1
  Top Layer w0.155: DD1.1@72.05,61.875 71.775,61.875 71.564,61.875 71.147,61.459 71.147,59.691 71.266,59.572 72.284,59.572 72.339,59.628 74.297,59.628 DD1.8@74.65,59.275 ; 75.4,57.3 75.4,58.108 75.128,58.38 74.995,58.38 74.65,58.725 74.65,59 DD1.8@74.65,59.275 ; DD1.9@75.575,59.925 75.3,59.925 DD1.8@74.65,59.275
NetHL1_2: HL1.2 R1.1 | length 1.9
  Top Layer w0.155: R1.1@64.975,56.7 HL1.2@66.875,56.7
NetHL2_1: HL2.1 R8.2 | length 1.9
  Top Layer w0.155: R8.2@64.975,54.8 HL2.1@66.875,54.8
NetL1_1: L1.1 VD1.1 VD2.5 | length 13.3
  Top Layer w0.3: VD1.1@59.8,72.1 59.85,72.1 60.55,71.4 60.55,71.35 62.5,69.4 62.5,67.765 63.4,66.865 ; VD2.5 63.625,63.4 63.4,63.625 63.4,66.865 ; L1.1@64.9,68.175 64.71,68.175 63.4,66.865
NetR4_1: R4.1 S1.1 | length 2.6
  Top Layer w0.3: S1.1 77.57,70.725 79.725,70.725 R4.1@80,70.45
NetR5_1: R5.1 S1.3 | length 2.7
  Top Layer w0.3: S1.3 77.72,68.425 79.75,68.425 R5.1@80.025,68.7
NetVD3_1: VD3.1 X2.1 | length 5.9
  Top Layer w0.3: VD3.1@86.8,68.825 86.85,68.825 89.4,66.275 89.4,65.866 89.576,65.69 X2.1
SPI_LINK: DD1.14 R8.1 | length 16.7
  Top Layer w0.15: R8.1@63.425,54.8 63.425,54.825 64.35,55.75 64.35,57.233 71.417,64.3 73.7,64.3 74,64 DD1.14@74,62.8
USB_D_N: DD1.7 VD2.6 | length 14.3
  Top Layer w0.155: VD2.6 64.775,64.35 65.278,63.847 65.278,63.643 65.368,63.553 65.688,63.553 65.738,63.503 65.866,63.503 66.2,63.836 v1(66.2,63.7) ; DD1.7@74,59 74,58.725 73.852,58.576 73.852,58.433 73.853,58.432 73.853,58.177 74.13,57.9 v1(74.2,57.9)
  Bottom Layer w0.155: v1(66.2,63.7) 66.266,63.7 66.513,63.452 68.832,63.452 73.853,58.432 73.853,58.177 74.13,57.9 v1(74.2,57.9)
USB_D_P: DD1.6 VD2.4 | length 13.7
  Top Layer w0.155: VD2.4 64.775,62.45 65.278,62.953 65.278,63.157 65.368,63.247 65.561,63.247 65.611,63.197 65.866,63.197 66.2,62.864 v1(66.2,62.9) ; v1(73.2,57.9) 73.27,57.9 73.547,58.177 73.547,58.306 73.546,58.307 73.546,58.538 73.432,58.653 73.422,58.653 73.35,58.725 DD1.6@73.35,59
  Bottom Layer w0.155: v1@66.2,62.864 66.229,62.864 66.513,63.147 68.706,63.147 73.547,58.306 73.547,58.177 73.27,57.9 v1(73.2,57.9)
pads on no net: DD1.2 DD1.4 DD1.16 X1.4

## Polygon pours and split planes (outlines as drawn)
GND on Top Layer "GND_L01_P034" (solid, pour order 34): 46.6,78.3 46.9,78 99.4,78 99.4,48.6 99.8,48.2 46.2,48.2
+5V on Top Layer "NONET_L01_P-001" (solid, pour order 12): 86.8,71.025 89.575,71.025 89.6,71 89.6,74.9 84.1,74.9 84,74.9 84,71
+5V on Top Layer "NONET_L01_P-001" (solid, pour order 10): 80.8,67.6 80.9,67.5 83,67.5 83.5,68 83.5,71.2 83,71.7 80.8,71.7
+5V on Top Layer "+5V_L01_P006" (solid, pour order 6): 76.5,59.8 80.8,59.8 80.8,62.3 76.5,62.3
+5V on Top Layer "+5V_L01_P004" (solid, pour order 4): 63.2,69.5 63.2,71.6 64.1,72.5 65.8,72.5 66.6,71.7 66.6,69.5
+5V on Top Layer "Top Layer-+5V" (solid, pour order 2): 66.2,70
+5V on Signal Layer 2 "+5V_L03_P044" (solid, pour order 44): 46.2,77.9 102.9,77.9 102.9,48 103,47.9 102.5,47.4 44.6,47.4
+5V on Signal Layer 2 "+5V_L03_P022" (solid, pour order 22): 44.2,79.8 45.3,78.7 101,78.7 101,48.6 100.2,47.8 99,49 44.5,49
GND on Signal Layer 1 "GND_L02_P036" (solid, pour order 36): 46.3,77.6 46.8,77.1 99.6,77.1 99.6,49.6 98.7,48.7 46.1,48.7
GND on Bottom Layer "GND_L04_P038" (solid, pour order 38): 46.9,77.6 99.1,77.6 99.6,77.1 98.8,76.3 98.8,48.4 46.6,48.4 46.5,48.3

## Silkscreen, mask and mechanical layers (free items; w line width, h text height)
Top Overlay:
  text "PWR" at 69.35,56 h1.2
  text "LINK" at 69.35,54.1 h1.2
  text "USB / SPI" at 87.5,52.6 h2
  text ".designation" at 75.581,50.6 h2
Bottom Overlay:
  text ".pcb_dec_number" at 91.7,50.6 h2
Board:
  the board outline again, w0.1
Assembly Notes (Mech5):
  text "'.title'" at 50,47.5 h2
  text "'.project'_'.pcb_dec_number'['.Pcb_File_Name_No_Path']" at 50,45 h2